# Altium PCB CPU-board-multi.PcbDoc (part 3 of 3)
Units mm, origin at the board's own origin, x right, y up, seen from the top; angles counter-clockwise.
Board outline 100 x 66.22 mm, 6 copper layers (L1, Power, L2, L3, CommonGND, L4), stack 2.134 mm thick; 307 components, 215 nets, 1002 pads, 415 vias.
Unrouted connection lines stored in the file: 11.
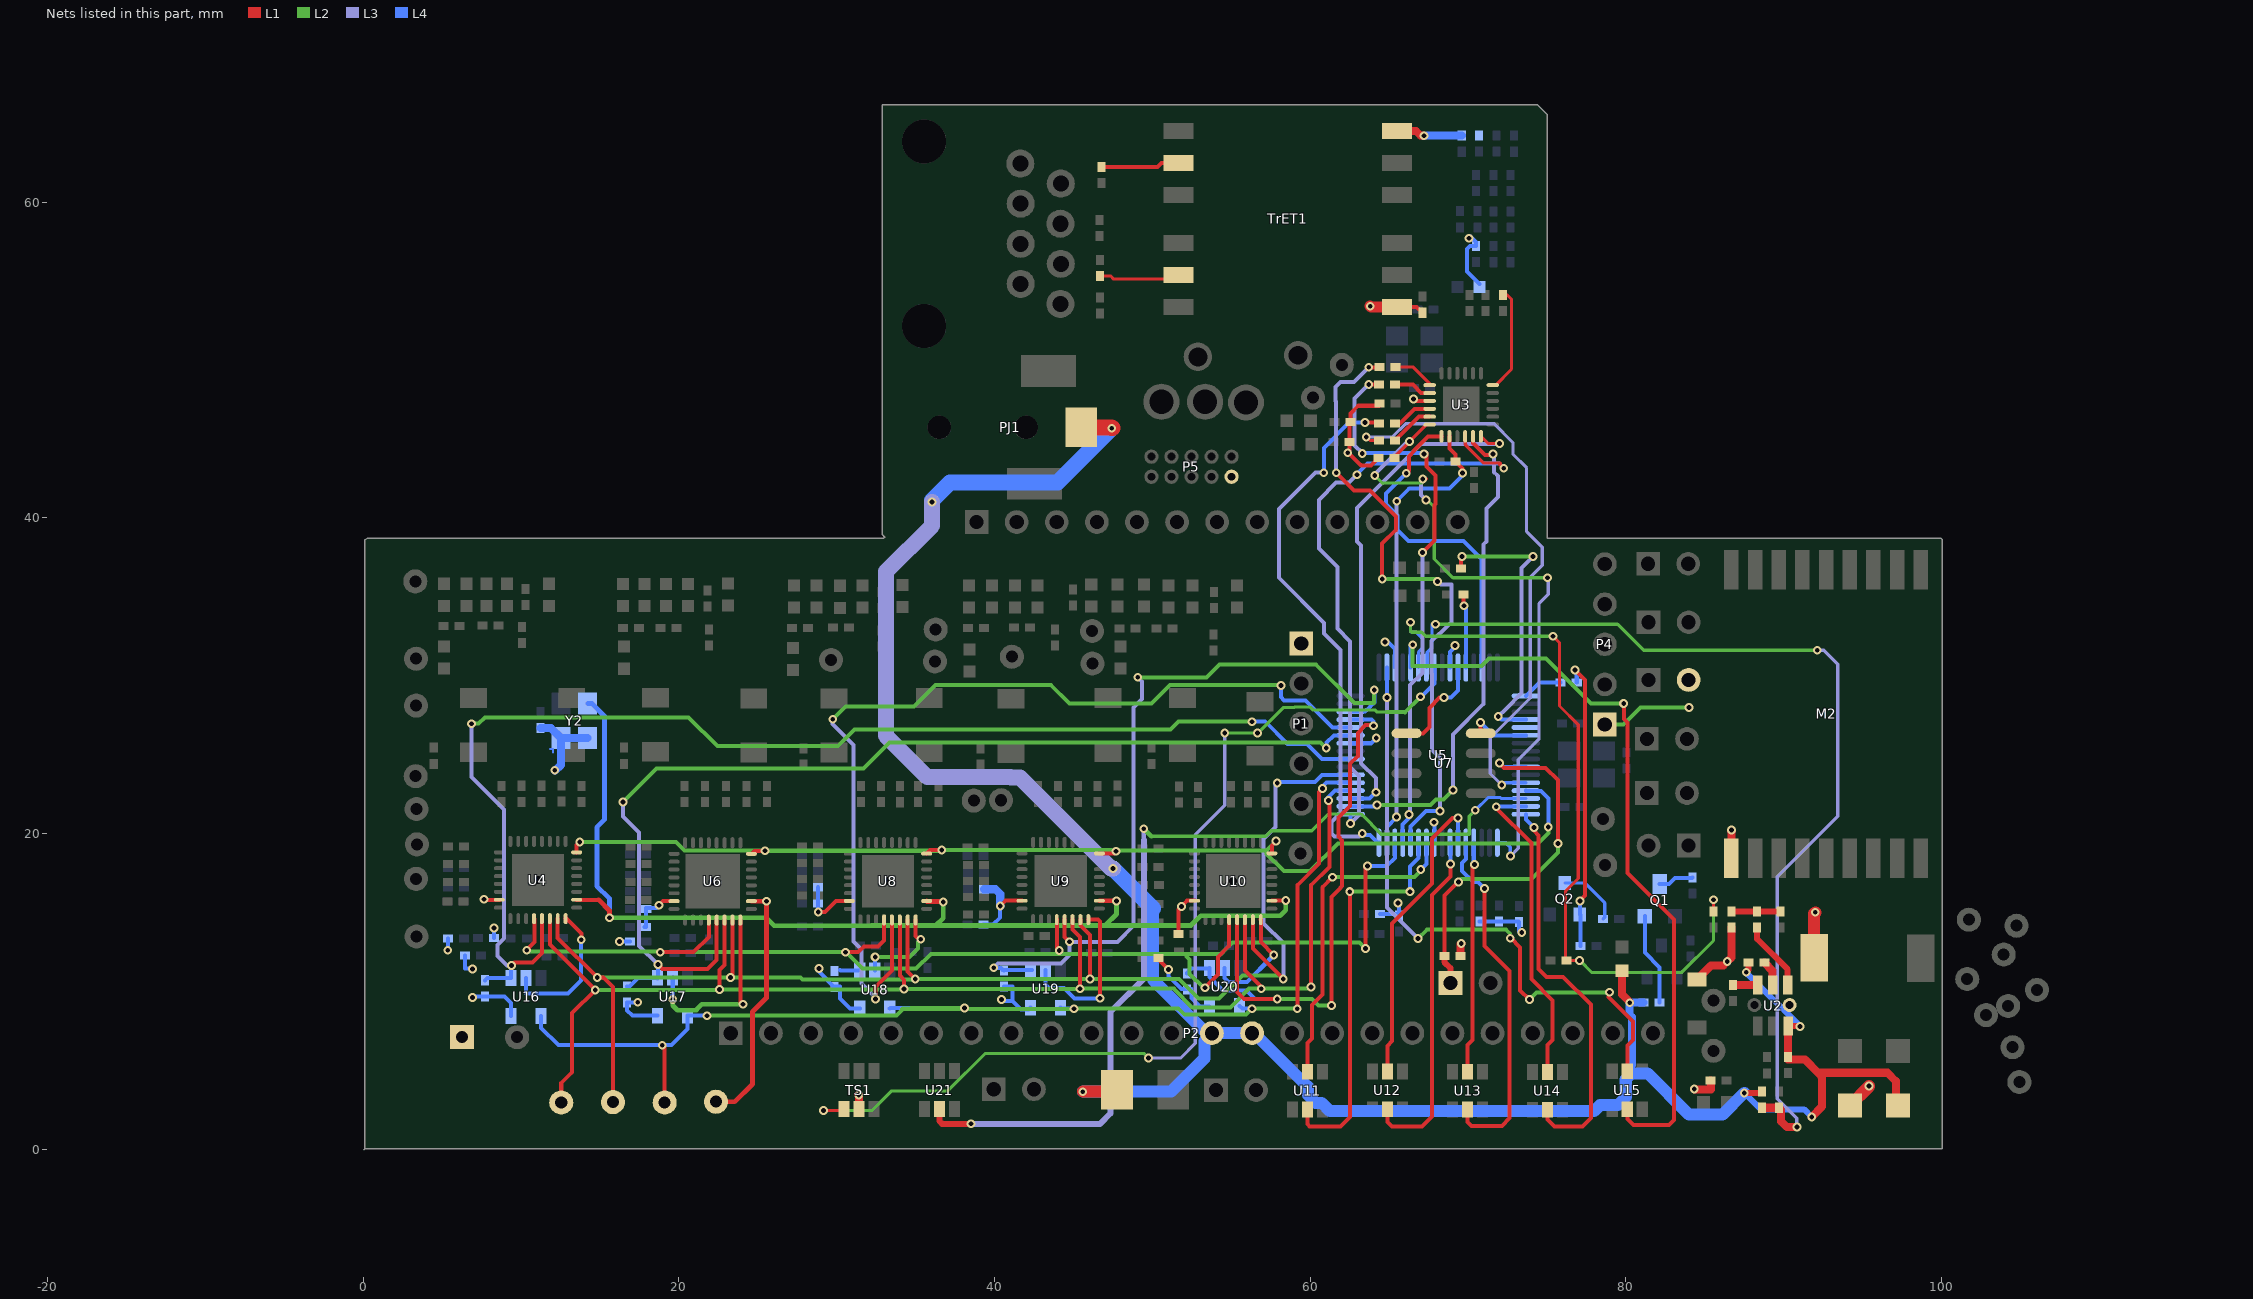
[diagram p7: the nets of this part, all layers, seen from the top]

## Via types
v1: diameter 0.559, hole 0.305, L1 to L4, 391 vias
v2: diameter 0.813, hole 0.508, L1 to L4, tented top, 19 vias
v3: diameter 0.559, hole 0.305, L1 to L4, tented top, 4 vias
v4: diameter 0.813, hole 0.457, L1 to L4, tented top, 1 vias

## Nets (pads, with @x,y where several pads share a name; then routed paths per layer and width w, separated by ;. In a path a pad name is that pad's centre, name@x,y a point inside that pad or via, vN(x,y) a via of type N, cw(c..) or ccw(c..) an arc to the next point about the centre after c; other vN are vias at no path point) (continued)
NetP6_1: P6.1 R121.2 U5.42 | length 24.6
  L1 w0.254: R121.2@68.504,12.243 68.504,16.07 69.193,16.759 69.235,16.759 v1(69.393,16.916) ; v1(71.984,24.46) 72.009,24.46 72.187,24.282 72.187,24.232 72.263,24.155 74.905,24.155 75.692,23.368 v1(75.692,19.355)
  L1 w0.381: R121.2@68.504,12.243 68.504,11.836 68.885,11.455 P6.1@68.885,10.516
  L2 w0.254: v1(69.393,16.916) 69.591,17.115 74.012,17.115 75.692,18.795 v1(75.692,19.355)
  L4 w0.254: v1(71.984,24.46) 72.009,24.46 72.26,24.209 U5.42@73.66,24.209
NetQ1_C: Q1.C R10.2 | length 2.3
  L4 w0.254: Q1.C@82.144,16.789 82.728,16.789 83.109,17.17 84.201,17.17 R10.2@84.226,17.196
NetQ1_E: Q1.E R4.1 | length 5.9
  L4 w0.254: Q1.E@81.204,14.757 81.204,12.446 82.144,11.506 R4.1@82.144,9.296
NetQ2_B: Q2.B R13.1 R16.2 | length 18.7
  L1 w0.254: v1(76.784,30.353) 77.409,29.728 77.409,16.068 77.089,15.748 v1(77.089,15.723)
  L4 w0.254: v1(76.784,30.353) 76.886,30.251 R13.1@76.886,29.566 ; Q2.B@77.089,14.864 v1(77.089,15.723) ; R16.2@77.114,12.852 Q2.B@77.114,14.829
NetQ2_C: Q2.C R9.1 | length 4.1
  L4 w0.203: Q2.C@76.134,16.859 77.4,16.859 78.664,15.596 78.664,14.681 R9.1@78.562,14.58
NetR3_1: R3.1 R7.2 U5.23 | length 64.2
  L1 w0.508: R3.1@88.621,2.616 R7.2@89.687,2.616 89.84,2.464 89.84,1.753 90.195,1.397 v1(90.83,1.397)
  L2 w0.203: v1(67.945,33.249) 79.477,33.249 81.128,31.598 v1(92.126,31.598)
  L3 w0.203: v1(90.83,1.397) 90.83,1.905 90.843,1.918 89.586,3.175 89.586,17.247 93.421,21.082 93.421,30.709 92.532,31.598 v1(92.126,31.598)
  L4 w0.203: U5.23@67.36,30.509 67.41,30.559 67.41,31.48 67.721,31.791 67.721,33.249 v1(67.945,33.249)
NetR12_1: R12.1 R15.2 U5.22 | length 49.1
  L1 w0.203: v1(75.387,32.487) 75.794,32.08 75.794,28.067 76.982,26.878 76.982,17.14 76.175,16.332 76.175,11.989 R15.2@76.225,11.938 76.835,11.938 76.835,11.963 76.86,11.938 v1(77.064,11.938) ; R12.1@85.547,15.037 v1(85.547,15.799)
  L2 w0.203: v1(66.345,33.376) 66.345,32.817 66.421,32.741 67.056,32.741 67.31,32.487 v1(75.387,32.487) ; v1(77.064,11.938) 76.86,11.938 76.835,11.963 77.064,11.963 77.851,11.176 83.515,11.176 85.547,13.208 v1(85.547,15.799)
  L4 w0.203: v1(66.345,33.376) 66.345,32.817 66.421,32.741 66.726,32.741 67.107,32.36 67.107,31.744 66.86,31.497 U5.22@66.86,30.509
NetR13_2: R13.2 U5.33 | length 2.6
  L4 w0.254: U5.33@73.66,28.709 74.517,29.566 R13.2@75.87,29.566
NetR14_2: R14.2 U2.6 | length 1.6
  L1 w0.508: R14.2@86.792,10.389 U2.6@88.346,10.389
NetR17_1: R17.1 U2.5 | length 1.6
  L1 w0.508: R17.1@88.773,11.811 89.296,11.288 U2.5@89.296,10.389
NetR18_1: R18.1 R19.2 R21.2 | length 3.1
  L1 w0.381: R19.2@86.69,15.037 R18.1@88.316,15.037 R21.2@89.789,15.037
NetR18_2: R18.2 U2.4 | length 4.4
  L1 w0.381: R18.2@88.316,14.021 88.316,13.31 90.246,11.379 U2.4@90.246,10.389
NetR22_1: R22.1 U3.12 U5.49 | length 43.9
  L1 w0.203: R22.1@65.354,43.79 65.354,43.861 66.294,44.801 v1(66.294,44.831) 67.362,45.899 U3.12@67.567,45.899 ; v1(67.132,42.443) 67.285,42.443 67.335,42.494 67.361,42.469 v1@67.361,42.443
  L2 w0.203: v1(64.084,42.672) 64.592,42.164 64.592,42.189 67.031,42.189 67.285,42.443 v1(67.132,42.443) ; v1(67.335,41.123) v1@67.335,41.193 ; v1@67.335,41.305 v1@67.335,41.193 ; v1(75.032,36.195) 69.037,36.195 67.852,37.38 67.852,40.677 v1@67.335,41.193
  L3 w0.203: v1(64.084,42.672) v1@64.084,42.723 ; v1@66.142,44.78 66.243,44.78 v1(66.294,44.831) ; v1@67.031,42.443 v1@67.285,42.443 ; v1(72.695,18.567) 73.177,19.05 73.177,24.663 74.498,25.984 74.498,34.571 75.082,35.155 75.082,36.144 v1(75.032,36.195)
  L3 w0.254: v1@64.084,42.723 v1@66.142,44.78 ; v1@67.031,42.443 67.031,41.427 v1(67.335,41.123)
  L4 w0.203: U5.49@71.86,19.409 72.387,19.409 72.669,19.126 v1@72.669,18.593
NetR28_2: R28.2 TrET1.11 | length 4.8
  L1 w0.203: R28.2@46.685,55.321 47.346,55.321 47.551,55.116 TrET1.11@51.405,55.116
NetR29_1: R29.1 U3.8 | length 2.4
  L1 w0.254: R29.1@65.38,48.438 66.396,48.438 66.404,48.43 66.497,48.43 67.027,47.899 U3.8@67.567,47.899
NetR29_2: R29.2 U5.61 | length 35.9
  L1 w0.254: v1(63.703,48.438) R29.2@64.364,48.438 ; v1(67.107,37.795) 67.877,38.566 67.877,40.171 67.869,40.179 67.869,40.801 67.94,40.872 67.94,42.677 67.361,43.256 67.361,44.094 67.306,44.04 v1(67.212,44.04)
  L3 w0.254: v1@63.297,44.094 62.814,44.577 62.814,47.549 v1(63.703,48.438) ; v1(66.257,21.189) 66.324,21.189 66.324,29.393 67.107,30.175 v1(67.107,37.795)
  L4 w0.254: v1(63.297,44.069) 63.322,44.094 67.361,44.094 67.306,44.04 v1(67.212,44.04) ; U5.61@65.86,19.409 65.86,20.576 66.319,21.036 66.319,21.209 66.277,21.209 v1(66.257,21.189)
NetR30_1: R30.1 U3.7 | length 2.7
  L1 w0.203: R30.1@65.405,49.555 66.497,49.555 67.567,48.486 U3.7@67.567,48.399
NetR30_2: R30.2 U5.60 | length 41.1
  L1 w0.254: v1(61.646,42.85) 62.768,41.727 63.781,41.727 65.423,40.085 65.423,39.236 64.541,38.354 64.541,36.195 64.618,36.119 v1(64.567,36.119) ; v1(63.703,49.53) 64.364,49.53 R30.2@64.389,49.555
  L2 w0.254: v1(64.567,36.119) 67.894,36.119 68.072,35.941 v1(68.072,35.966)
  L3 w0.254: v1(61.646,42.85) 61.646,47.359 61.6,47.405 61.6,48.265 61.93,48.595 62.768,48.595 v1(63.703,49.53) ; v1(68.072,35.966) 68.275,35.763 68.956,35.763 68.956,33.274 68.825,33.274 68.195,32.644 68.167,32.644 67.696,32.173 67.696,30.119 67.716,30.099 67.716,25.273 68.224,24.765 v1(68.224,21.412)
  L4 w0.254: U5.60@66.36,19.409 66.36,20.437 67.335,21.412 v1(68.224,21.412)
NetR31_1: R31.1 U3.11 | length 2.8
  L1 w0.254: R31.1@65.38,44.882 66.897,46.399 U3.11@67.567,46.399
NetR31_2: R31.2 U5.44 | length 36.4
  L1 w0.203: 63.779,44.882 R31.2@64.364,44.882
  L3 w0.203: v1(63.551,45.11) 65.202,45.11 66.04,45.949 71.653,45.949 72.847,44.755 72.847,44.018 73.711,43.155 73.711,39.116 74.701,38.125 74.701,36.982 73.939,36.22 73.939,28.575 71.404,26.04 71.404,23.795 v1(72.136,23.063)
  L4 w0.203: v1(72.136,23.063) 72.282,23.209 U5.44@73.66,23.209
NetR32_1: R32.1 U3.10 | length 2.6
  L1 w0.254: R32.1@65.38,45.974 65.684,45.974 66.609,46.899 U3.10@67.567,46.899
NetR32_2: R32.2 U5.64 | length 35.3
  L1 w0.254: v1(63.475,46.025) R32.2@64.313,46.025
  L3 w0.254: v1(60.858,42.85) 60.325,42.85 58.014,40.538 58.014,36.195 60.884,33.325 60.884,32.664 61.925,31.623 61.925,21.311 61.341,20.726 61.341,19.99 61.544,19.787 63.094,19.787 v1(63.297,19.99)
  L4 w0.254: v1(60.858,42.85) 60.858,44.425 62.459,46.025 v1(63.475,46.025) ; v1(63.297,19.99) 63.297,19.964 63.373,19.888 63.779,19.888 64.259,19.409 U5.64@64.36,19.409
NetR33_2: R33.2 TrET1.8 | length 5
  L1 w0.254: R33.2@46.763,62.228 48.717,62.228 50.328,62.228 50.58,62.48 TrET1.8@51.657,62.48
NetR35_2: R35.1 U3.14 U5.63 | length 29.7
  L1 w0.254: U3.14@68.817,45.149 68.817,44.391 69.215,43.993 R35.1@69.215,43.561 69.652,43.124 v1(69.652,42.822)
  L3 w0.254: v1(65.471,21.042) 65.481,21.052 v1(65.481,41.046) v1@65.481,41.199
  L4 w0.254: U5.63@64.86,19.409 64.86,20.41 65.471,21.021 v1(65.471,21.042) ; v1(65.481,41.046) 66.274,41.839 68.814,41.839 69.672,42.697 69.672,42.801 v1(69.652,42.822)
NetR37_2: R37.2 U3.24 | length 6.7
  L1 w0.203: U3.24@71.567,48.399 71.742,48.399 72.754,49.411 72.754,53.846 72.5,54.1 R37.2@72.2,54.1
NetR67_1: R67.1 U5.36 | length 18.2
  L1 w0.254: R67.1@69.545,36.779 69.545,37.465 v1(69.621,37.541)
  L2 w0.254: v1(69.621,37.541) v1(74.117,37.541)
  L3 w0.254: v1(71.907,27.407) 72.39,27.889 73.381,28.88 73.381,36.805 v1(74.117,37.541)
  L4 w0.254: v1(71.907,27.407) 72.105,27.209 U5.36@73.66,27.209
NetR68_1: R68.1 U5.28 | length 4.6
  L1 w0.254: v1@69.698,34.468 R68.1@69.698,35.128
  L4 w0.254: v1(69.748,34.417) 69.86,34.305 U5.28@69.86,30.509
NetR113_2: R113.2 U4.29 U5.8 U16.1 | length 82.1
  L1 w0.254: v1(9.398,11.633) 9.576,11.811 10.719,11.811 11.324,12.417 U4.29@11.324,14.593
  L2 w0.254: v1(6.858,26.949) 7.315,26.949 7.722,27.356 20.625,27.356 22.454,25.527 30.069,25.527 31.115,26.573 51.156,26.573 51.659,27.076 v1(56.312,27.076)
  L3 w0.254: v1(6.858,26.949) 6.858,23.571 8.915,21.514 8.915,13.335 8.509,12.929 8.509,12.243 9.119,11.633 v1(9.398,11.633)
  L4 w0.254: R113.2@7.722,10.693 7.861,10.833 U16.1@9.378,10.833 9.378,11.613 v1(9.398,11.633) ; v1(56.312,27.076) 57.15,27.076 58.572,25.654 59.802,25.654 60.747,24.709 U5.8@62.56,24.709
NetR114_2: R114.2 U5.11 U6.29 U17.1 | length 69.1
  L1 w0.254: v1(18.669,11.684) 18.948,11.405 21.819,11.405 22.395,11.981 U6.29@22.395,14.506
  L2 w0.254: v1(16.459,21.996) 18.567,24.105 31.699,24.105 33.35,25.756 60.655,25.756 v1(61.011,25.4)
  L3 w0.254: v1(16.459,21.996) 16.459,21.082 17.475,20.066 17.475,12.878 v1(18.669,11.684)
  L4 w0.254: R114.2@16.713,10.312 16.866,10.312 17.399,10.846 U17.1@18.633,10.82 ; U17.1@18.659,10.846 18.669,10.856 v1(18.669,11.684) ; v1(61.011,25.4) 61.041,25.43 61.041,25.756 61.494,26.209 U5.11@62.56,26.209
NetR115_2: R115.2 U18.1 | length 1.3
  L4 w0.254: 30.201,11.328 30.226,11.303 U18.1@31.46,11.303
NetR116_2: R116.2 U5.14 U9.29 U19.1 | length 50.3
  L1 w0.254: U9.29@44.442,14.531 44.442,13.445 v1(44.755,13.132)
  L2 w0.254: v1@49.098,29.87 53.428,29.87 54.266,30.709 60.35,30.709 62.814,28.245 64.008,28.245 64.033,28.27 64.033,29.058 v1(64.059,29.083)
  L3 w0.254: v1(39.954,11.481) 40.213,11.765 44.218,11.765 44.755,12.302 v1@44.755,13.106 ; v1(44.755,13.132) v1@44.755,13.106 ; v1(49.073,29.896) 49.352,29.616 49.352,28.499 48.819,27.965 48.819,14.148 47.777,13.106 v1@44.755,13.106
  L4 w0.254: v1(39.954,11.481) 40.411,11.481 R116.2@40.538,11.354 ; R116.2@40.513,11.354 R116.2@40.538,11.354 ; R116.2@40.589,11.303 R116.2@40.538,11.354 ; U19.1@42.382,11.354 U19.1@42.281,11.354 R116.2@40.538,11.354 ; U5.14@62.56,27.709 63.482,27.709 63.785,28.012 63.785,28.022 64.059,28.296 v1(64.059,29.083)
NetR117_2: R117.2 U5.13 U10.29 U20.1 | length 39.1
  L1 w0.254: U10.29@55.365,14.531 55.365,9.938 55.804,9.5 v1(57.912,9.5) ; v1(61.341,9.093) 61.341,15.977 61.905,16.54 61.905,16.557 62.027,16.679 62.027,19.558 61.798,19.787 61.798,21.006 62.535,21.742 62.535,24.41 63.012,24.888 63.012,26.36 63.513,26.86 63.97,26.86 v1(64.008,26.822)
  L2 w0.254: v1(57.912,9.5) 60.122,9.5 60.528,9.093 v1(61.341,9.093)
  L4 w0.254: R117.2@52.197,11.125 52.197,11.151 52.476,11.43 U20.1@53.582,11.43 ; U20.1@53.619,11.468 53.619,10.897 54.483,10.033 55.977,10.033 56.51,9.5 v1(57.912,9.5) ; U5.13@62.56,27.209 63.875,27.209 63.881,27.203 63.881,27.229 64.008,27.102 v1(64.008,26.822)
NetTP7_1: TP7.1 U4.2 U6.2 U8.2 U9.2 U10.2 Y2.3 | length 84.9
  L1 w0.254: U4.2@13.524,15.793 14.915,15.793 ; U10.2@57.565,15.731 57.582,15.748 v1(58.445,15.748)
  L1 w0.305: 14.915,15.793 15.596,15.113 v1(15.596,14.656) ; TP7.1@22.352,2.997 23.546,2.997 24.663,4.115 24.663,8.687 25.552,9.576 v1(25.552,15.697) U6.2@24.603,15.697 ; U8.2@35.699,15.714 35.72,15.693 36.707,15.693 v1(36.754,15.646) ; U9.2@46.642,15.731 47.718,15.731 v1(47.727,15.723)
  L2 w0.305: v1(15.596,14.656) 25.527,14.656 ; v1(25.552,15.697) 25.552,14.681 25.527,14.656 ; v1(36.754,15.646) 36.754,14.63 36.292,14.168 ; v1(47.727,15.723) 47.727,14.884 47.01,14.168 ; v1(58.445,15.748) 58.445,15.138 58.09,14.783 53.061,14.783 52.446,14.168 47.01,14.168 ; 25.527,14.656 26.035,14.148 32.18,14.148 32.2,14.168 36.292,14.168 ; 36.292,14.168 47.01,14.168
  L4 w0.305: Y2.3@14.222,28.235 14.488,28.235 15.286,27.437 15.286,20.858 14.808,20.381 14.808,16.662 15.596,15.875 v1(15.596,14.656)
NetTP8_1: TP8.1 U4.30 U5.4 U6.30 U8.30 U9.30 U10.30 | length 92.9
  L1 w0.254: U4.30@11.824,14.593 11.824,12.967 v1(14.707,10.085) 13.233,8.612 13.233,4.865 12.548,4.179 TP8.1@12.548,2.946 ; v1(22.581,10.109) 22.581,11.354 22.895,11.668 U6.30@22.895,14.506 ; U8.30@33.999,14.517 33.999,10.985 34.265,10.719 v1(34.265,10.135) ; U9.30@44.942,14.531 44.942,13.91 45.415,13.437 v1(45.415,10.16) ; U10.30@55.865,14.531 55.865,11.318 56.896,10.287 v1(56.896,10.16) ; v1(60.046,10.262) 60.046,16.713 61.214,17.882 61.214,21.92 v1@61.062,22.073
  L2 w0.254: v1(14.707,10.085) 22.557,10.085 v1(22.581,10.109) 34.265,10.109 v1(34.265,10.135) 45.39,10.135 v1(45.415,10.16) 51.359,10.16 51.359,10.13 52.522,8.966 54.94,8.966 56.134,10.16 v1(56.896,10.16) 59.944,10.16 v1(60.046,10.262)
  L4 w0.254: v1(61.163,22.073) 61.011,22.073 61.011,22.149 61.571,22.709 U5.4@62.56,22.709
NetTP9_1: TP9.1 U4.31 U5.6 U6.31 U8.31 U9.31 U10.31 | length 92.3
  L1 w0.254: U4.31@12.324,14.593 12.324,13.38 v1(14.834,10.871) 15.215,10.871 15.824,10.262 TP9.1@15.824,2.972 ; v1(23.266,10.871) 23.395,11 U6.31@23.395,14.506 ; U8.31@34.499,14.517 34.499,11.247 v1(34.976,10.77) ; U9.31@45.442,14.531 45.442,14.169 46.048,13.564 46.05,13.564 v1@46.05,10.744 ; U10.31@56.365,14.531 56.365,12.697 v1(58.293,10.77)
  L2 w0.254: v1(14.834,10.871) v1(23.266,10.871) 27.711,10.871 27.833,10.749 34.971,10.749 34.976,10.754 v1(34.976,10.77) v1(46.05,10.77) 51.689,10.77 52.934,9.525 54.229,9.525 55.702,10.998 58.064,10.998 v1(58.293,10.77)
  L3 w0.254: v1(57.912,23.19) 57.81,23.089 57.81,20.396 57.048,19.634 57.048,14.3 58.293,13.056 v1(58.293,10.77)
  L4 w0.254: v1@57.988,23.266 60.3,23.266 60.742,23.709 U5.6@62.56,23.709
NetTP10_1: TP10.1 U5.5 U16.4 U17.4 U18.4 U19.4 U20.4 | length 81.8
  L1 w0.254: v1(18.948,6.579) 19.101,6.426 TP10.1@19.101,2.946 ; v1(59.182,8.89) 59.182,16.713 60.554,18.085 60.554,22.606 v1(60.782,22.835)
  L2 w0.254: v1(21.781,8.446) 33.795,8.446 34.214,8.865 ; v1(38.1,8.941) 34.722,8.941 34.646,8.865 ; v1(59.182,8.89) v1(56.312,8.89) 55.931,8.509 52.019,8.509 51.638,8.89 v1(45.034,8.89) 45.009,8.865 34.646,8.865 ; 34.214,8.865 34.646,8.865 ; 34.214,8.865 34.138,8.865 34.188,8.915 34.595,8.915 34.646,8.865
  L4 w0.254: U16.4@11.278,8.433 11.278,7.671 12.37,6.579 v1(18.948,6.579) 19.533,6.579 20.559,7.605 U17.4@20.559,8.446 v1(21.781,8.446) ; U18.4@33.36,8.903 33.398,8.941 v1(38.1,8.941) ; U19.4@44.181,8.954 44.245,8.89 v1(45.034,8.89) ; U20.4@55.519,9.068 55.697,8.89 v1(56.312,8.89) ; v1@60.782,22.758 v1(60.782,22.835) ; v1@60.782,22.962 61.03,23.209 U5.5@62.56,23.209
NetTS1_1: TS1.1 U5.24 | length 63.4
  L1 w0.203: v1(29.159,2.438) 30.358,2.438 TS1.1@30.46,2.54
  L2 w0.203: v1(29.159,2.438) 32.233,2.438 33.477,3.683 37.033,3.683 39.395,6.045 49.479,6.045 v1(49.759,5.766) ; v1(54.59,26.36) v1(56.666,26.36) 56.666,26.341 56.667,26.34 58.293,27.965 58.967,27.965 59.001,27.999 59.993,27.999 60.184,27.808 64.121,27.808 64.243,27.686 64.846,27.686
  L2 w0.254: 64.846,27.686 65.964,27.686 65.989,27.661 v1(66.98,28.651)
  L3 w0.203: v1(49.759,5.766) 51.791,5.766 52.722,6.697 52.722,19.905 54.59,21.773 v1(54.59,26.36) ; v1@56.544,26.238 v1(56.666,26.36)
  L4 w0.254: v1(66.98,28.651) 67.005,28.651 67.86,29.506 U5.24@67.86,30.509
NetU3_13: U3.13 U5.30 | length 21.2
  L1 w0.254: v1(66.08,42.81) 66.243,42.974 66.243,43.891 66.608,44.256 66.608,44.29 67.467,45.149 U3.13@68.317,45.149
  L4 w0.254: v1(66.08,42.81) 64.795,41.526 64.795,40.877 65.541,40.132 65.536,40.132 65.536,39.214 66.218,38.532 69.698,38.532 70.86,37.369 U5.30@70.86,30.509
NetU3_16: U3.16 U5.1 | length 38.5
  L1 w0.203: U3.16@69.817,45.149 69.817,44.634 70.991,43.459 72.034,43.459
  L1 w0.254: 72.034,43.358 v1(72.263,43.129)
  L3 w0.254: v1(62.56,20.625) 63.094,21.158 63.094,23.647 62.535,24.206 62.535,32.168 61.727,32.976 61.727,36.86 60.554,38.034 60.554,41.123 61.646,42.215 62.459,42.215 v1(62.967,42.723)
  L4 w0.254: v1(62.56,20.625) 62.56,21.031 ; v1@62.941,42.748 63.619,43.426 71.966,43.426 v1(72.263,43.129)
NetU3_17: U3.17 U5.2 | length 31.4
  L1 w0.254: U3.17@70.317,45.149 70.317,44.737 71.087,43.967 v1@71.579,43.967
  L2 w0.254: v1(64.237,21.793) 67.615,21.793 67.97,22.149 68.453,22.149 v1(69.05,22.746)
  L3 w0.254: v1(69.05,22.746) 69.05,26.276 70.963,28.189 70.963,38.298 71.171,38.506 71.171,40.572 71.902,41.304 71.902,42.635 71.658,42.879 71.658,43.976 71.65,43.967 v1(71.579,44.039)
  L4 w0.254: U5.2@62.56,21.709 v1@64,21.709 ; v1@64.16,21.869 v1(64.237,21.793)
NetU3_18: U3.18 U5.3 | length 32.3
  L1 w0.203: U3.18@70.817,45.149 71.262,44.704 v1@71.958,44.704
  L3 w0.203: v1@71.953,44.674 v1(71.984,44.704)
  L3 w0.254: v1(64.16,22.606) 64.16,23.499 63.221,24.439 63.221,38.227 62.967,38.481 62.967,40.615 63.195,40.843 67.026,44.674 v1@71.953,44.674
  L4 w0.254: U5.3@62.56,22.209 63.763,22.209 v1(64.16,22.606)
NetU4_8: U4.8 U5.45 U6.8 U8.8 U9.8 U10.8 | length 72.7
  L1 w0.254: U4.8@13.524,18.793 13.524,19.265 v1(13.716,19.456) ; U6.8@24.595,18.706 24.787,18.898 v1(25.451,18.898) ; U8.8@35.699,18.717 35.921,18.94 36.643,18.94 v1(36.652,18.948) ; U9.8@46.642,18.731 47.56,18.731 v1(47.701,18.872) ; U10.8@57.565,18.731 57.565,19.237 v1(57.836,19.507)
  L2 w0.254: v1(13.716,19.456) 19.812,19.456 20.345,18.923 25.425,18.923 v1(25.451,18.898) v1(25.451,18.898) 36.603,18.899 v1(36.652,18.948) 47.625,18.948 v1(47.701,18.872) 47.742,18.913 57.241,18.913 ; v1(57.836,19.507) 57.241,18.913 ; v1(75.082,20.396) 75.082,20.015 74.422,19.355 61.747,19.355 59.995,17.602 58.344,17.602 57.241,18.705 57.241,18.913
  L4 w0.254: U5.45@73.66,22.709 73.685,22.684 74.607,22.684 75.082,22.209 v1(75.082,20.396)
NetU4_28: U4.28 U5.62 U6.28 U8.28 U9.28 U10.28 | length 83.2
  L1 w0.254: v1(10.363,12.598) 10.363,12.649 10.841,13.127 10.841,14.577 U4.28@10.824,14.593 ; v1(18.821,12.471) 20.93,12.471 21.895,13.437 U6.28@21.895,14.506 ; v1(30.556,12.471) 31.359,12.471 31.72,12.832 32.61,12.832 32.999,13.221 U8.28@32.999,14.517 ; U9.28@43.942,14.531 43.942,12.725 v1(44.094,12.573) v1@44.094,12.497 ; v1(53.327,10.223) 54.153,11.049 54.153,12.167 54.865,12.879 U10.28@54.865,14.531 ; v1(63.5,12.7) 63.5,17.805 v1(63.627,17.932)
  L2 w0.254: v1(10.363,12.598) 10.434,12.527 18.766,12.527 v1(18.821,12.471) v1(30.556,12.471) 30.582,12.471 31.623,11.43 35.027,11.43 35.966,12.37 52.146,12.37 ; v1(53.327,10.223) 53.226,10.223 52.344,11.105 52.344,12.011 52.146,12.209 52.146,12.37 ; v1(63.5,12.7) 63.119,13.081 55.067,13.081 54.356,12.37 52.146,12.37
  L4 w0.254: v1(63.627,17.932) 64.846,17.932 65.36,18.446 U5.62@65.36,19.409
NetU4_32: U4.32 U16.2 | length 9.1
  L1 w0.254: U4.32@12.824,14.593 12.889,14.593 13.818,13.665 v1(13.818,13.259)
  L4 w0.254: U16.2@10.328,10.833 10.328,9.865 12.99,9.865 13.792,10.668 13.792,13.233 v1(13.818,13.259)
NetU5_12: U5.12 U8.29 | length 60.6
  L1 w0.254: v1(32.461,9.5) 32.461,10.262 33.499,11.299 U8.29@33.499,14.517
  L2 w0.254: v1(29.743,27.229) 30.556,28.042 34.9,28.042 36.271,29.413 43.561,29.413 44.755,28.219 49.936,28.219 51.13,29.413 58.09,29.413 v1(58.141,29.362)
  L3 w0.254: v1(29.743,27.229) 29.743,26.924 31.064,25.603 31.064,13.157 31.572,12.649 31.572,10.49 32.487,9.576 32.461,9.55 v1(32.461,9.5)
  L4 w0.254: v1(58.141,29.362) 58.141,28.626 58.352,28.414 59.698,28.414 61.404,26.709 U5.12@62.56,26.709
NetU5_18: U5.18 U15.5 | length 39.4
  L1 w0.254: v1(72.669,13.36) 72.72,13.36 73.304,12.776 73.304,10.058 v1(73.889,9.474) ; 78.892,9.627 80.442,8.077 80.442,6.909 80.086,6.553 U15.5@80.086,4.928 ; v1@78.892,9.931 v1(78.969,9.931)
  L2 w0.254: v1(66.827,13.335) 67.386,13.894 72.399,13.894 72.653,13.64 ; v1@72.644,13.335 v1(72.669,13.36) ; v1(73.889,9.474) 74.346,9.931 v1(78.969,9.931)
  L3 w0.254: v1(64.86,28.6) 64.86,15.302 v1(66.827,13.335)
  L4 w0.254: v1(64.86,28.6) U5.18@64.86,30.509
NetU5_21: U5.21 U15.2 | length 49.4
  L1 w0.254: v1@79.883,28.219 79.883,27.242 80.086,27.038 80.086,23.321 80.112,23.296 80.112,17.501 83.058,14.554 83.058,1.854 82.728,1.524 80.467,1.524 80.086,1.905 U15.2@80.086,2.528
  L2 w0.254: v1(66.497,31.953) 66.421,31.953 66.37,31.902 66.472,31.801 66.472,30.607 70.866,30.607 71.323,31.064 74.93,31.064 77.775,28.219 v1(79.858,28.219)
  L4 w0.254: U5.21@66.36,30.509 66.36,31.892 66.421,31.953 v1(66.497,31.953)
NetU5_27: U5.27 U7.1 | length 6.5
  L1 w0.254: U7.1@66.103,26.34 67.158,26.34 67.551,26.733 67.551,27.953 68.199,28.6 v1(68.478,28.6)
  L4 w0.254: v1(68.478,28.6) 68.91,28.6 69.367,29.058 U5.27@69.367,30.502
NetU5_37: U5.37
NetU5_46: U5.46 U21.2 | length 58.1
  L1 w0.381: U21.2@36.5,2.54 36.5,1.778 36.678,1.6 v1@38.481,1.6
  L2 w0.203: 49.936,19.812 57.175,19.812 57.531,20.168 60.096,20.168 61.163,21.234 63.221,21.234 63.886,20.569 ; 63.876,20.569 64.506,19.939 70.079,19.939 70.079,21.082 v1(70.46,21.463)
  L2 w0.305: v1(49.454,20.295) 49.936,19.812
  L3 w0.305: 49.454,19.583 v1(49.454,20.295)
  L3 w0.381: v1(38.506,1.6) 46.685,1.6 47.346,2.261 47.346,8.687 49.454,10.795 49.454,12.992 49.454,17.386 49.454,19.583
  L4 w0.203: v1(70.46,21.463) 71.267,22.271 72.046,22.271 72.107,22.209 U5.46@73.66,22.209
  L4 w0.381: v1@38.481,1.6 v1(38.506,1.6)
NetU5_47: U5.47 U14.5 | length 20.3
  L1 w0.254: v1(71.78,21.692) 71.78,21.615 74.016,19.38 74.016,10.77 75.362,9.423 75.362,6.909 75.032,6.579 U14.5@75.032,4.889
  L2 w0.254: v1(71.78,21.692) v1@71.806,21.692
  L4 w0.254: v1@71.806,21.692 71.823,21.709 U5.47@73.66,21.709
NetU5_48: U5.48 U14.2 | length 25.4
  L1 w0.254: v1(74.168,20.371) 74.168,20.167 74.468,19.867 74.468,11.41 74.981,10.897 76.022,10.897 77.775,9.144 77.775,1.956 77.241,1.422 75.489,1.422 75.032,1.88 U14.2@75.032,2.489
  L4 w0.254: U5.48@73.685,21.184 U5.48@73.66,21.209 73.66,20.879 v1(74.168,20.371)
NetU5_52: U5.52 U13.5 | length 14.7
  L1 w0.254: U13.5@69.977,4.902 69.977,6.604 70.282,6.909 70.282,17.932 70.383,18.034 v1(70.409,18.034)
  L4 w0.254: U5.52@70.36,19.409 70.36,18.083 v1(70.409,18.034)
NetU5_53: U5.53 U13.2 | length 22.7
  L1 w0.254: U13.2@69.977,2.502 69.977,1.727 70.231,1.473 72.136,1.473 72.627,1.964 72.627,11.269 71.044,12.852 v1(71.044,16.51)
  L4 w0.254: U5.53@69.86,19.409 69.86,18.374 69.621,18.136 69.621,17.628 70.333,16.916 70.637,16.916 v1(71.044,16.51)
NetU5_54: U5.54 U12.5 | length 19.7
  L1 w0.254: U12.5@64.887,4.915 64.887,6.543 65.176,6.833 65.176,14.275 67.716,16.815 67.716,19.685 69.012,20.98 v1(69.367,20.98)
  L4 w0.254: U5.54@69.36,19.409 69.367,19.416 v1(69.367,20.98)
NetU5_55: U5.55 U12.2 | length 21.9
  L1 w0.254: U12.2@64.887,2.515 64.887,1.712 65.176,1.422 66.605,1.422 67.081,1.422 67.716,2.057 67.716,16.095 68.885,17.263 v1(68.885,18.059)
  L4 w0.254: U5.55@68.86,19.409 68.885,19.384 v1(68.885,18.059)
NetU5_58: U5.58 U11.5 | length 20.7
  L1 w0.254: U11.5@59.817,4.902 59.817,6.706 60.122,7.01 60.122,9.119 60.782,9.779 60.782,16.586 v1(61.417,17.221)
  L2 w0.254: v1(61.417,17.221) 66.599,17.221 v1@67.081,17.704
  L4 w0.254: v1(67.005,17.704) 67.36,18.059 U5.58@67.36,19.409
NetU5_59: U5.59 U11.2 | length 25.4
  L1 w0.254: U11.2@59.817,2.502 59.817,1.575 59.969,1.422 61.925,1.422 62.53,2.027 62.53,8.251 62.509,8.272 v1(62.509,16.307)
  L2 w0.254: v1(62.509,16.307) v1(66.319,16.307)
  L4 w0.254: v1(66.319,16.307) 66.319,17.907 66.86,18.448 U5.59@66.86,19.409
NetU6_32: U6.32 U17.2 | length 11.9
  L1 w0.254: U6.32@23.895,14.506 23.895,9.328 v1(24.054,9.169)
  L2 w0.305: v1(19.609,9.474) 19.609,9.093 19.914,8.788 21.107,8.788 21.107,8.814 21.463,9.169 v1(24.054,9.169)
  L4 w0.305: v1(19.609,9.474) U17.2@19.609,10.846
NetU8_32: U8.32 U18.2 | length 6
  L1 w0.254: U8.32@34.999,14.517 34.999,13.503 35.268,13.233 v1(35.326,13.292)
  L2 w0.254: v1(32.436,12.167) 34.62,12.167 35.154,12.7 35.154,13.132 35.314,13.292 v1(35.326,13.292)
  L4 w0.254: U18.2@32.41,11.303 32.41,12.167 v1(32.436,12.167)
NetU9_32: U9.32 U19.2 | length 10.4
  L1 w0.254: U9.32@45.942,14.531 46.556,14.531 46.685,14.402 v1(46.685,9.55)
  L4 w0.254: U19.2@43.231,11.354 43.231,10.439 43.459,10.211 44.399,10.211 45.06,9.55 v1(46.685,9.55)
NetU10_32: U10.32 U20.2 | length 8.2
  L1 w0.254: U10.32@56.865,14.531 56.871,14.526 56.871,13.106 v1(57.683,12.294)
  L4 w0.254: U20.2@54.569,11.468 54.569,10.836 54.813,10.592 55.982,10.592 v1@57.556,12.167 ; 56.82,11.379 57.683,12.243 v1(57.683,12.294)
VCC: 
VCC1: J6.2
VCC=3.3V: C10.1 C13.1 C15.1 C23.1 C29.1 C30.1 C31.1 C34.2 C37.2 C38.1 C40.2 C41.2 C44.2 C45.2 C56.1 C57.1 C74.1 C75.1 C95.1 C97.1 C108.1 C110.2 C125.2 D5.A L2.2 L3.1 M2.10 P1.1 P4.1 P5.9 R19.1 R20.1 R22.2 R36.2 R38.2 R39.2 R59.2 R113.1 R114.1 R115.1 R116.1 R117.1 R121.1 TrET1.1 TrET1.6 TS1.2 U3.9 U4.23 U5.10 U5.19 U5.26 U5.38 U5.57 U6.23 U7.8 U8.23 U9.23 U10.23 U16.5 U17.5 U18.5 U19.5 U20.5 Y2.1 Y2.4 | length 101.2
  L1 w0.254: v1(7.645,15.824) 7.676,15.793 U4.23@8.624,15.793 ; v1@16.104,13.157 v1(16.231,13.157) ; v1(18.745,15.443) 19.008,15.706 U6.23@19.695,15.706 ; v1(28.829,15.011) 29.261,15.011 29.967,15.717 U8.23@30.799,15.717 ; v1(40.361,15.392) 40.699,15.731 U9.23@41.742,15.731 ; C108.1@50.394,12.09 50.394,12.014 v1(51.029,11.379) ; C110.2@51.664,13.614 51.664,15.183 v1(51.838,15.357) 51.838,15.363 52.205,15.731 U10.23@52.665,15.731 ; R39.2@62.484,45.999 R38.2@62.484,44.78 62.484,44.247 62.459,44.272 62.382,44.196 v1(62.382,44.12) 63.175,43.327 63.217,43.327 63.237,43.307 63.856,43.307 R22.2@64.338,43.79 ; R39.2@62.56,46.076 62.56,46.609 63.043,47.092 R36.2@64.364,47.092 ; TrET1.1@65.5,53.336 66.748,53.336 C13.1@67.1,52.984 ; TrET1.1@65.842,53.03 TrET1.1@65.862,53.01 ; v1(66.548,47.523) 66.672,47.399 U3.9@67.567,47.399 ; v1(70.05,57.703) v1@70.05,57.75 ; v1(70.79,27.026) 70.803,27.012 U7.8@70.803,26.34
  L1 w0.508: v1(31.394,3.429) 31.41,3.414 TS1.2@31.41,2.54 ; TrET1.6@65.5,64.512 66.688,64.512 67,64.2 v1(67.2,64.2) ; R121.1@69.52,12.243 69.52,12.979 v1(69.571,13.03) ; v1(84.328,3.81) 84.353,3.785 85.395,3.785 85.395,4.318 R20.1@85.369,4.343 ; D5.A@84.506,10.744 85.395,11.633 86.182,11.633 ; v1(86.423,11.874) 86.69,12.141 R19.1@86.69,14.021 ; M2.10@86.682,18.415 86.682,20.21 v1(86.69,20.218)
  L1 w0.7: v1(63.8,53.4) 63.864,53.336 TrET1.1@65.5,53.336
  L1 w0.762: L2.2@91.923,12.116 91.923,14.923 v1(92,15) ; C10.1@94.209,2.769 95.4,3.96 v1(95.4,4)
  L2 w0.254: v1(7.645,15.824) 7.838,15.824 v1@7.812,15.85 ; v1(69.164,31.902) v1@69.164,31.953 ; P4.1@78.664,26.899 79.858,26.899 80.924,27.965 v1(83.998,27.965)
  L3 w0.254: v1@73.381,13.691 v1(73.406,13.716)
  L4 w0.254: v1(5.359,12.598) 5.359,13.31 C41.2@5.385,13.335 ; C30.1@6.452,12.268 6.452,11.43 6.934,11.43 v1(6.934,11.405) ; v1(6.934,9.601) 7.01,9.677 R113.1@7.722,9.677 8.941,9.677 9.378,9.241 U16.5@9.378,8.433 ; C29.1@8.28,13.36 v1(8.28,13.995) ; v1(16.231,13.157) 16.281,13.106 16.332,13.157 C37.2@16.916,13.157 ; v1(17.399,9.296) R114.1@16.713,9.296 16.713,8.788 17.056,8.446 U17.5@18.659,8.446 ; C56.1@17.831,14.072 C56.1@17.907,14.072 17.907,15.24 17.932,15.265 18.567,15.265 v1(18.745,15.443) ; v1@18.644,15.316 v1@18.72,15.392 ; C75.1@28.804,16.586 28.804,15.596 C74.1@28.829,15.57 v1(28.829,15.011) ; v1(28.88,11.43) 28.88,11.237 29.804,10.312 30.201,10.312 30.201,9.55 30.848,8.903 U18.5@31.46,8.903 ; C95.1@39.294,14.224 39.903,14.224 40.361,14.681 v1(40.361,15.392) ; v1(40.437,9.474) 40.538,9.373 41.148,9.373 ; R116.1@40.589,10.287 41.148,10.287 41.148,9.373 ; U19.5@42.281,8.954 42.166,8.839 41.681,8.839 41.148,9.373 ; v1(51.029,11.379) 51.029,10.947 51.841,10.135 52.476,10.135 52.476,9.576 53.01,9.042 U20.5@53.594,9.042 ; v1(51.838,15.357) v1@51.943,15.462 ; U5.10@62.56,25.709 63.851,25.709 63.856,25.705 v1(64.186,26.035) ; R59.2@64.414,14.884 65.557,14.884 C45.2@65.634,14.808 65.634,15.519 v1(65.557,15.596) ; v1(64.745,32.131) 64.922,32.131 65.36,31.693 U5.19@65.36,30.509 ; v1(67.843,20.701) 67.86,20.684 U5.57@67.86,19.409 ; U5.26@68.86,30.509 68.86,31.497 69.177,31.813 69.177,31.89 v1(69.164,31.902) ; v1(70.05,57.703) 70.05,57.75 70.1,57.8 70.157,57.8 70.5,57.457 C44.2@70.5,57.216 70.116,57.216 69.921,57.021 69.921,55.606 L3.1@70.714,54.813 ; C38.1@70.739,14.402 C40.2@71.958,14.402 73.203,14.402 C34.2@73.228,14.376 73.228,13.792 73.304,13.716 v1(73.406,13.716) ; v1(70.79,27.026) 71.606,26.209 U5.38@73.66,26.209
  L4 w0.508: C125.2@11.227,26.67 11.887,26.67 Y2.1@12.522,26.035 ; v1(12.141,24.003) 12.167,23.978 12.522,24.333 Y2.1@12.522,26.035 ; Y2.4@14.222,26.035 Y2.1@12.522,26.035 ; C97.1@39.319,16.459 40.056,16.459 40.361,16.154 v1(40.361,15.392) ; v1(67.2,64.2) C15.1@69.6,64.2
VCC=12V: C8.1 C9.1 D2.1 D4.K P2.13 P2.14 pad.0@90.373,9.119 PJ1.1 R3.2 R4.2 R17.2 U2.3 | length 148.4
  L1 w0.381: v1(87.503,3.556) R3.2@88.621,3.556 ; v1@87.757,11.354 R17.2@87.757,11.811 ; U2.3@90.296,7.789 91.017,7.789 v1(91.034,7.772)
  L1 w0.508: D2.1@79.756,11.303 79.756,9.804 80.264,9.296 v1(80.239,9.271) ; U2.3@90.296,7.789 90.272,7.764 C9.1@90.272,5.842 90.272,5.664 91.338,5.664 92.2,4.803 ; v1(91.77,2.032) 92.431,2.692 92.431,4.572 92.2,4.803 ; C8.1@97.231,2.769 97.1,2.9 97.1,4.3 96.567,4.833 92.231,4.833 92.2,4.803
  L1 w0.762: v1(45.593,3.632) 47.631,3.632 D4.K@47.758,3.759
  L1 w1.016: PJ1.1@45.5,45.72 47.422,45.72 47.473,45.669 v1(47.422,45.669)
  L3 w1.016: v1(36.043,40.996) 36.043,39.497 33.122,36.576 33.122,26.187 35.743,23.566 41.02,23.566 41.04,23.546 41.601,23.546 47.366,17.78 v1(47.503,17.78)
  L4 w0.381: v1(87.503,3.556) 88.544,2.515 91.288,2.515 v1(91.77,2.032) ; v1(87.63,11.201) 87.63,11.176 v1(91.034,7.772)
  L4 w0.508: 80.112,5.055 80.374,5.317 80.374,8.374 80.239,8.509 v1(80.239,9.271) 80.264,9.296 R4.2@81.128,9.296
  L4 w0.762: v1(45.593,3.632) 51.181,3.632 53.289,5.74 53.289,6.858 P2.13@53.772,7.341 ; 50.038,15.245 50.038,10.731 53.429,7.341 P2.13@53.772,7.341 ; v1(87.503,3.556) 86.131,2.184 83.993,2.184 81.382,4.796 80.371,4.796 79.99,4.415 79.99,3.287 79.487,2.784 78.359,2.784 77.975,2.4 61.252,2.4 60.726,2.926 60.35,2.926 59.847,3.429 59.847,3.952 56.459,7.341 P2.14@56.312,7.341 P2.13@53.772,7.341
  L4 w1.016: v1(36.043,40.996) 36.043,41.097 37.186,42.24 43.993,42.24 v1(47.422,45.669) ; v1(47.503,17.78) 50.038,15.245
pads on no net: D6.NC J1.A J1.B M2.4 M2.9 M2.13 M2.14 M2.15 M2.16 M2.17 M2.18 P5.6 P5.7 PJ1. TS1.3 TS1.4 TS1.6 U4.1 U4.4 U4.5 U4.6 U4.7 U4.24 U5.34 U5.35 U6.1 U6.4 U6.5 U6.6 U6.7 U6.24 U7.7 U8.1 U8.4 U8.5 U8.6 U8.7 U8.24 U9.1 U9.4 U9.5 U9.6 U9.7 U9.24 U10.1 U10.4 U10.5 U10.6 U10.7 U10.24 U21.3 U21.4
copper on no net: | length 24.2
  L1 w0.254: -17.573,8.253 -17.076,6.725 ; -17.359,37.907 -16.84,39.427 ; -17.33,6.727 -16.822,6.724 ; -17.094,39.429 -16.586,39.425 ; -17.016,15.053 -17.076,6.725 ; -16.9,31.1 -16.84,39.427 ; -16.557,8.246 -17.076,6.725 ; -16.343,37.9 -16.84,39.427
  L4 w0.127: 3.302,-3.835 3.378,-3.759

## Polygon pours and split planes (outlines as drawn)
GND on L4 "Top Layer-No Net" (solid, pour order 6): 10.592,30.785 10.643,30.734 15.519,30.734 15.519,29.566 16.51,28.575 16.459,28.524 16.459,24.105 14.91,24.105 14.351,23.546 14.224,23.673 10.643,23.673 10.643,24.13 9.169,25.603 9.169,29.566 9.22,29.566 10.338,30.683
GND on L4 "Top Layer-No Net" (solid, pour order 4): 64.364,29.058 64.516,29.21 71.831,29.21 71.831,21.082 71.958,20.955 71.882,21.031 64.211,21.031 64.211,29.185 64.262,29.235 64.287,29.21 64.618,29.21
VCC=3.3V on Power (split plane): 74.264,65.577 74.496,65.346 74.496,38.684 74.506,38.585 74.535,38.489 74.582,38.401 74.645,38.323 74.723,38.26 74.811,38.213 74.907,38.184 75.006,38.174 99.54,38.174 99.54,0.536 0.612,0.536 0.612,38.174 32.969,38.174 33.069,38.184 33.165,38.213 33.253,38.26 33.33,38.323 33.406,38.399 33.47,38.477 33.517,38.565 33.546,38.661 33.556,38.76 33.546,38.86 33.517,38.956 33.47,39.044 33.406,39.121 33.403,39.124 33.403,48.539 48.463,48.539 48.463,44.399 56.54,44.399 56.54,65.657 74.185,65.657
GND on CommonGND (split plane): 74.264,65.577 74.496,65.346 74.496,38.684 74.506,38.585 74.535,38.489 74.582,38.401 74.645,38.323 74.723,38.26 74.811,38.213 74.907,38.184 75.006,38.174 99.54,38.174 99.54,0.536 0.612,0.536 0.612,38.174 32.969,38.174 33.069,38.184 33.165,38.213 33.253,38.26 33.33,38.323 33.406,38.399 33.47,38.477 33.517,38.565 33.546,38.661 33.556,38.76 33.546,38.86 33.517,38.956 33.47,39.044 33.406,39.121 33.403,39.124 33.403,48.641 49.124,48.641 49.124,44.704 49.022,44.602 49.124,44.501 57.506,44.526 57.531,49.632 57.531,65.532 33.403,65.532 33.403,65.657 74.185,65.657

## Keep-outs
Keep-Out Layer:
  lines w0.5: 0,0.559 0,40.31 ; 0.076,40.64 32.817,40.64 32.817,66.218 74.498,66.218 74.498,40.64 100.076,40.64 ; 0.152,0.559 100.076,0.559
  lines w0.508: 100.076,0.559 100.076,40.64

## Other copper
L1:
  text "32.703 (mm)" at -16.1,15.3 h1.52 r89.59
CommonGND (plane layer: these items are gaps in the copper):
  pour cut-out: 32.969,48.641 49.124,48.641 49.124,44.704 49.022,44.602 49.124,44.501 57.506,44.526 57.531,49.632 57.531,65.532 32.766,65.532 32.766,48.819 32.487,48.539
Power (plane layer: these items are gaps in the copper):
  pour cut-out: 32.588,48.438 32.69,48.539 48.463,48.539 48.463,44.399 56.54,44.399 56.54,66.472 56.439,66.573 56.236,66.37 32.69,66.37 32.69,48.641

## Silkscreen, mask and mechanical layers (free items; w line width, h text height)
Top Overlay:
  lines w0.127: -1.194,2.286 102.845,2.286 ; 2.54,42.647 2.54,-1.473 2.616,-1.549 ; 29.515,40.767 29.642,40.64 109.601,40.64 ; 67.342,45.485 67.342,45.349 67.342,45.46 66.98,45.822 66.98,48.587 67.342,48.949 ; 67.767,44.924 67.767,44.908 68.148,44.526 70.969,44.526 71.367,44.924 ; 67.767,49.374 67.767,49.428 68.123,49.784 70.957,49.784 71.367,49.374 ; 69.342,39.649 114.605,39.649 ; 71.792,45.349 72.024,45.582 72.136,45.582 72.136,45.693 72.136,48.59 71.792,48.935 71.792,48.949 ; 79.172,7.341 113.309,7.341
  lines w0.2: 99.822,0.025 116.764,0.025
  lines w0.254: -11.024,1.469 -10.516,-0.055 ; -11.024,64.421 -10.516,65.945 ; -10.77,-0.055 -10.262,-0.055 ; -10.77,65.945 -10.262,65.945 ; -10.516,27.841 -10.516,-0.055 ; -10.516,38.049 -10.516,65.945 ; -10.008,1.469 -10.516,-0.055 ; -10.008,64.421 -10.516,65.945 ; -2.54,41.605 0,41.631 ; -1.529,42.123 0,41.631 ; -1.519,41.108 0,41.631 ; -0.003,41.885 0.003,41.377 ; 0.051,-5.232 0.051,-4.724 ; 1.574,-5.488 0.051,-4.978 ; 1.575,-4.472 0.051,-4.978 ; 2.563,41.91 2.568,41.402 ; 4.084,42.179 2.565,41.656 ; 4.094,41.163 2.565,41.656 ; 5.105,41.681 2.565,41.656 ; 5.74,-0.686 5.994,0.076 ; 5.74,0.076 6.248,0.076 ; 5.74,2.261 6.248,2.261 ; 5.74,3.023 5.994,2.261 ; 5.994,-2.464 5.994,0.076 ; 5.994,4.801 5.994,2.261 ; 6.248,-0.686 5.994,0.076 ; 6.248,3.023 5.994,2.261 ; 32.969,67.996 32.97,68.504 ; 34.492,67.739 32.969,68.25 ; 34.494,68.755 32.969,68.25 ; 41.76,67.4 44.3,67.4 ; 42.039,-5.01 0.051,-4.978 ; 43.176,67.025 44.3,67.4 ; 43.176,67.775 44.3,67.4 ; 44.3,67.146 44.3,67.654 ; 48.492,68.221 32.969,68.25 ; 51.7,67.146 51.7,67.654 ; 52.824,67.025 51.7,67.4 ; 52.824,67.775 51.7,67.4 ; 54.24,67.4 51.7,67.4 ; 57.833,-5.023 99.822,-5.055 ; 58.446,68.202 73.969,68.174 ; 72.444,67.668 73.969,68.174 ; 72.446,68.684 73.969,68.174 ; 73.969,67.92 73.969,68.428 ; 98.298,-5.561 99.822,-5.055 ; 98.298,-4.545 99.822,-5.055 ; 99.822,-5.309 99.822,-4.801 ; 108.918,38.048 109.423,39.573 ; 108.964,8.864 109.474,7.341 ; 109.169,39.573 109.677,39.574 ; 109.22,7.34 109.728,7.341 ; 109.436,31.481 109.423,39.573 ; 109.461,15.433 109.474,7.341 ; 109.934,38.05 109.423,39.573 ; 109.98,8.865 109.474,7.341 ; 112.943,1.453 113.436,-0.076 ; 113.182,-0.074 113.69,-0.079 ; 113.295,38.13 113.817,39.649 ; 113.55,11.763 113.436,-0.076 ; 113.563,39.652 114.071,39.647 ; 113.704,27.81 113.817,39.649 ; 113.959,1.443 113.436,-0.076 ; 114.311,38.121 113.817,39.649
  lines w0.3: 51.7,52.4 51.7,67.4
  lines w0.4: 48.692,12.624 48.692,12.827
  lines w0.5: 0,0.229 0,38.989 ; 1.245,40.31 31.547,40.31 ; 32.893,41.478 32.893,64.846 ; 34.392,66.218 73.279,66.218 ; 74.676,41.935 74.676,64.999 ; 76.073,40.513 98.908,40.513 ; 100.063,-0.051 100.063,39.319
  lines w0.508: 0,-0.051 100.063,-0.051 ; 0.102,38.989 cw(c0.942,39.419) 1.372,40.261 ; 31.471,40.386 ccw(c31.608,41.519) 32.741,41.656 ; 32.893,64.948 cw(c34.002,65.109) 34.163,66.218 ; 73.407,66.209 cw(c73.461,64.993) 74.676,64.922 ; 74.676,41.783 ccw(c75.699,41.536) 75.946,40.513 ; 98.897,40.552 cw(c98.934,39.484) 100,39.55 ; 100.063,38.633 100.063,1.054 100.127,0.991
  text "41 (mm)" at 48.744,67.306 h1.52 r359.89
  text "7.4 (mm)" at 43.915,64.543 h1.12
  text "2.566 (mm)" at -5.689,37.917 h1.52 r0.57
  text "32.233 (mm)" at 108.522,31.225 h1.52 r270.09
  text "66 (mm)" at -9.601,28.095 h1.52 r90
  text "39.727 (mm)" at 114.466,12.008 h1.52 r89.45
  text "2.184 (mm)" at 8.128,-2.348 h0.76 r90
  text "99.771 (mm)" at 42.293,-5.925 h1.52 r359.96
Bottom Overlay:
  circle w0.254: c63.322,20.498 r0.161
  lines w0.381: 1.321,-0.051 1.372,-0.102
  text "TP5" at 67.793,45.441 h0.51
  text "TP7" at 15.164,29.921 h0.51
  text "TP5" at 48.209,28.423 h0.51
  text "©OpenStrom licensed under CC-BY-SA" at 4.318,3.404 h2.54
  text "Rev.0.7" at 27.28,1.397 h0.76
Mechanical 1:
  lines w0.254: 0.229,0.787 0.102,0.66 106.324,0.66 106.502,0.483 ; 31.217,53.137 31.394,53.315
Mechanical 15:
  lines w0.3: 48.692,64.973 48.539,64.821 48.539,47.396 48.641,47.295 62.23,47.295 62.433,47.092 62.433,64.897 62.357,64.973 49.2,64.973

## Text inside footprints (layer, text, board x,y; h text height)
BT1: Top Overlay "+" at 51.626,3.157 h1.15